# Altium PCB PCB2.PcbDoc (part 2 of 2)
Units mil, origin at the board's own origin, x right, y up, seen from the top; angles counter-clockwise.
Board outline 2500 x 2460 mil, 2 copper layers (Top Layer, Bottom Layer); 50 components, 75 nets, 347 pads, 13 vias.
Unrouted connection lines stored in the file: 43.
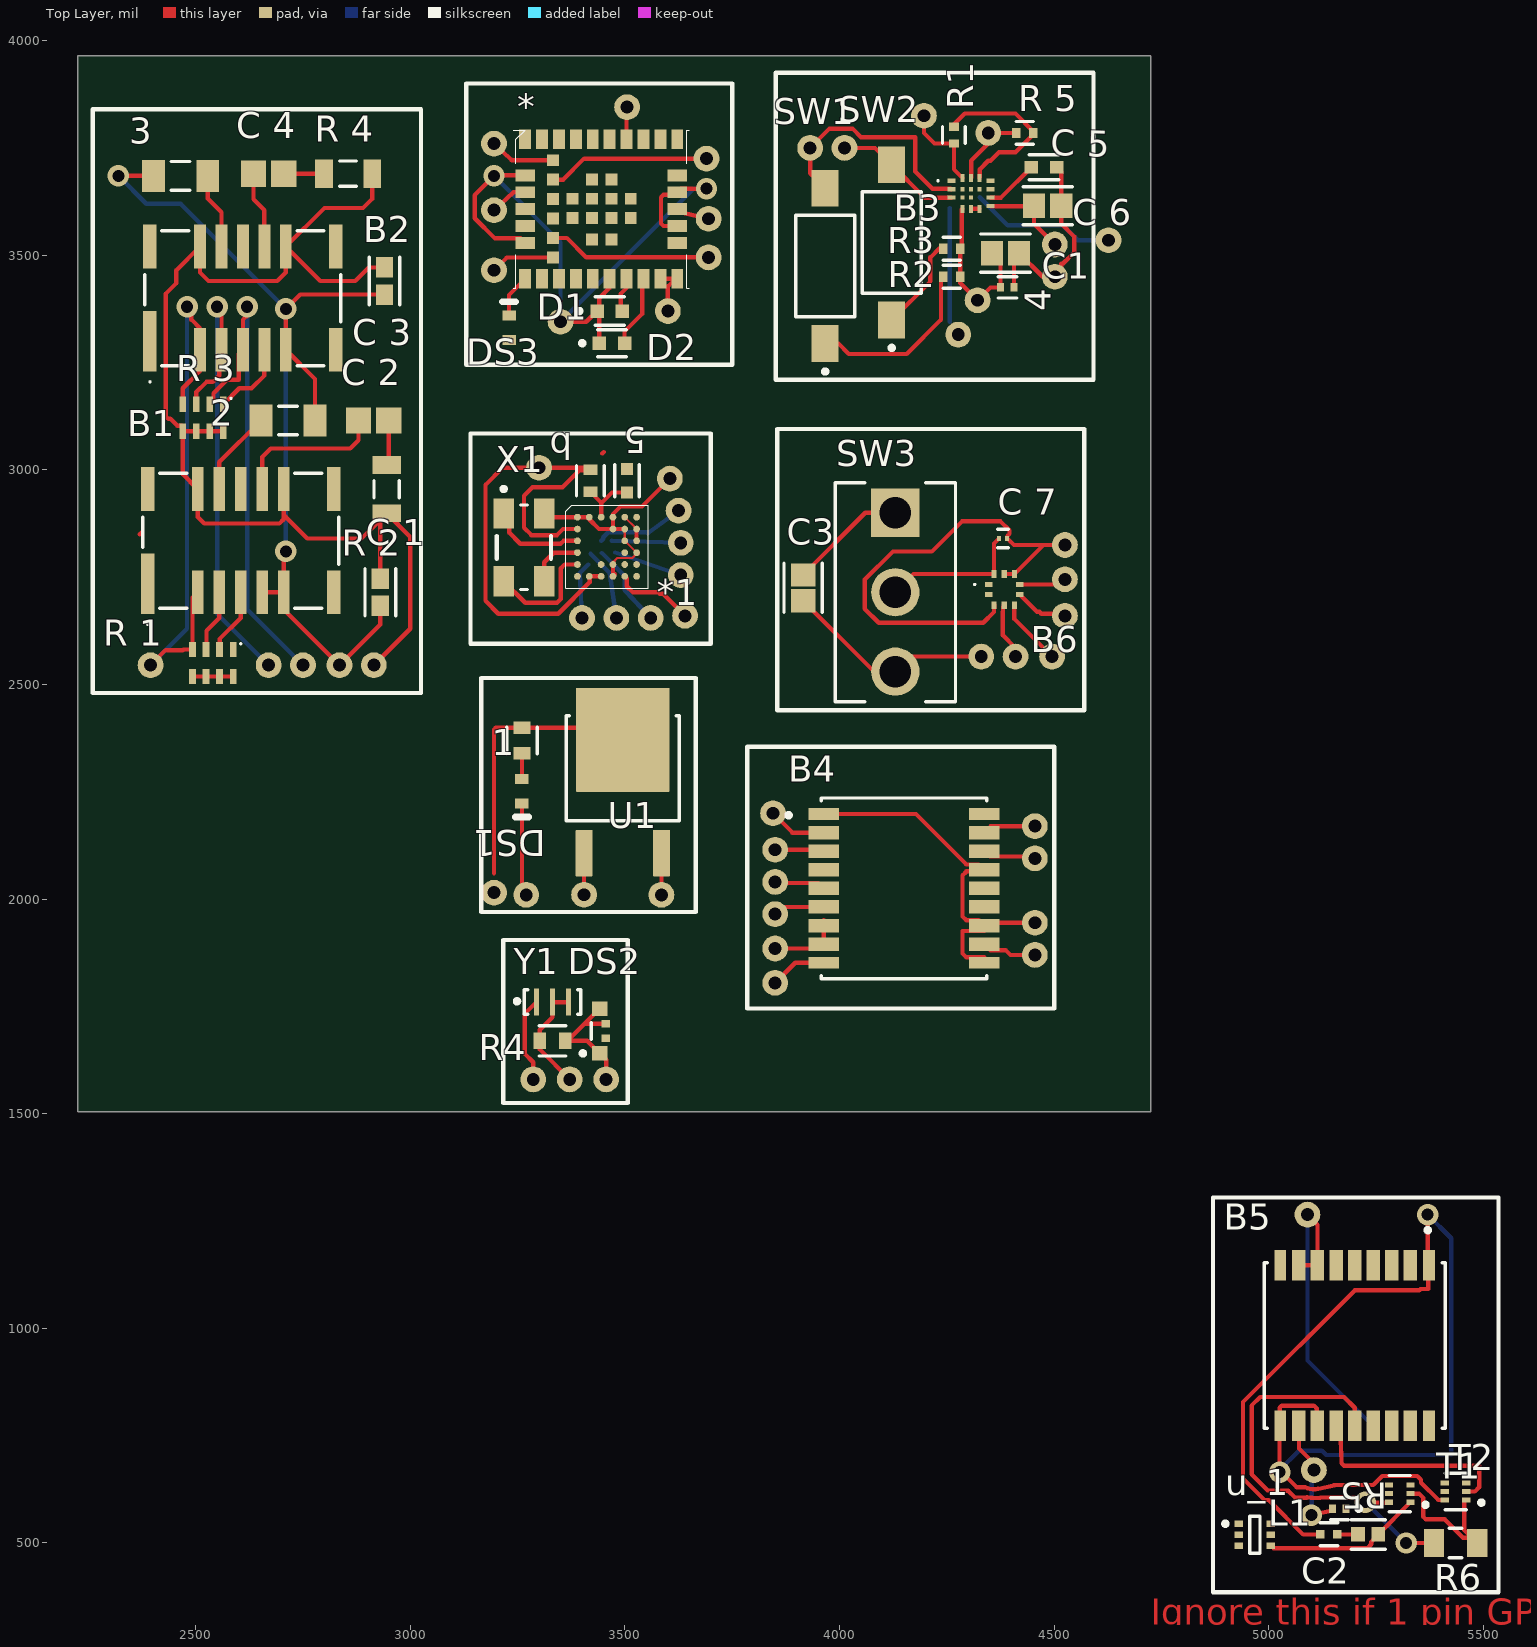
[diagram p0: Top Layer view]

## Via types
v1: diameter 50, hole 28, Top Layer to Bottom Layer, 13 vias

## Nets (pads, with @x,y where several pads share a name; then routed paths per layer and width w, separated by ;. In a path a pad name is that pad's centre, name@x,y a point inside that pad or via, vN(x,y) a via of type N, cw(c..) or ccw(c..) an arc to the next point about the centre after c; other vN are vias at no path point) (continued)
copper on no net: (continued)
  Bottom Layer w10: 3379.63,2664.63 3400,2655 3394.63,2759.63 3414.63,2779.63 ; 3419.63,2804.63 3464.63,2759.63 3480,2655 ; 3444.63,2834.63 3449.63,2839.63 3449.63,2842.91 3461.34,2854.63 3550.48,2854.63 3553.28,2851.83 3625,2905 ; 3446.27,2806.27 3499.63,2752.91 3499.63,2719.63 3560,2655 ; 3469.63,2834.63 3630,2830 ; 4256.5,3345 4256.5,3610 ; 4326.5,3635 4391.5,3570 4520.14,3570 4555.14,3535 4626.5,3535

## Other copper
Top Layer:
  text "Ignore this if 1 pin GPS antenna" at 4725,309.99 h60

## Silkscreen, mask and mechanical layers (free items; w line width, h text height)
Top Overlay:
  lines w10: 2260,2480 3025,2480 3025,3840 2260,3840 2260,2480 ; 3130,3245 3750,3245 3750,3900 3130,3900 3130,3245 ; 3140,2594.63 3699.63,2594.63 3699.63,3084.63 3140,3084.63 3140,2594.63 ; 3165,1970 3665,1970 3665,2515 3165,2515 3165,1970 ; 3216.3,1525 3506.3,1525 3506.3,1905 3216.3,1905 3216.3,1525 ; 3785,1745 4500,1745 4500,2355 3785,2355 3785,1745 ; 3851.5,3210 4591.5,3210 4591.5,3925 3851.5,3925 3851.5,3210 ; 3855,2440 4570,2440 4570,3095 3855,3095 3855,2440 ; 4870,385 5535,385 5535,1305 4870,1305 4870,385